# Altium PCB in_board.PcbDoc
Units mm, origin at the board's own origin, x right, y up, seen from the top; angles counter-clockwise.
Board outline 194.4 x 171.4 mm, 2 copper layers (Top Layer, Bottom Layer); 127 components, 196 nets, 535 pads, 0 vias.
Unrouted connection lines stored in the file: 320.
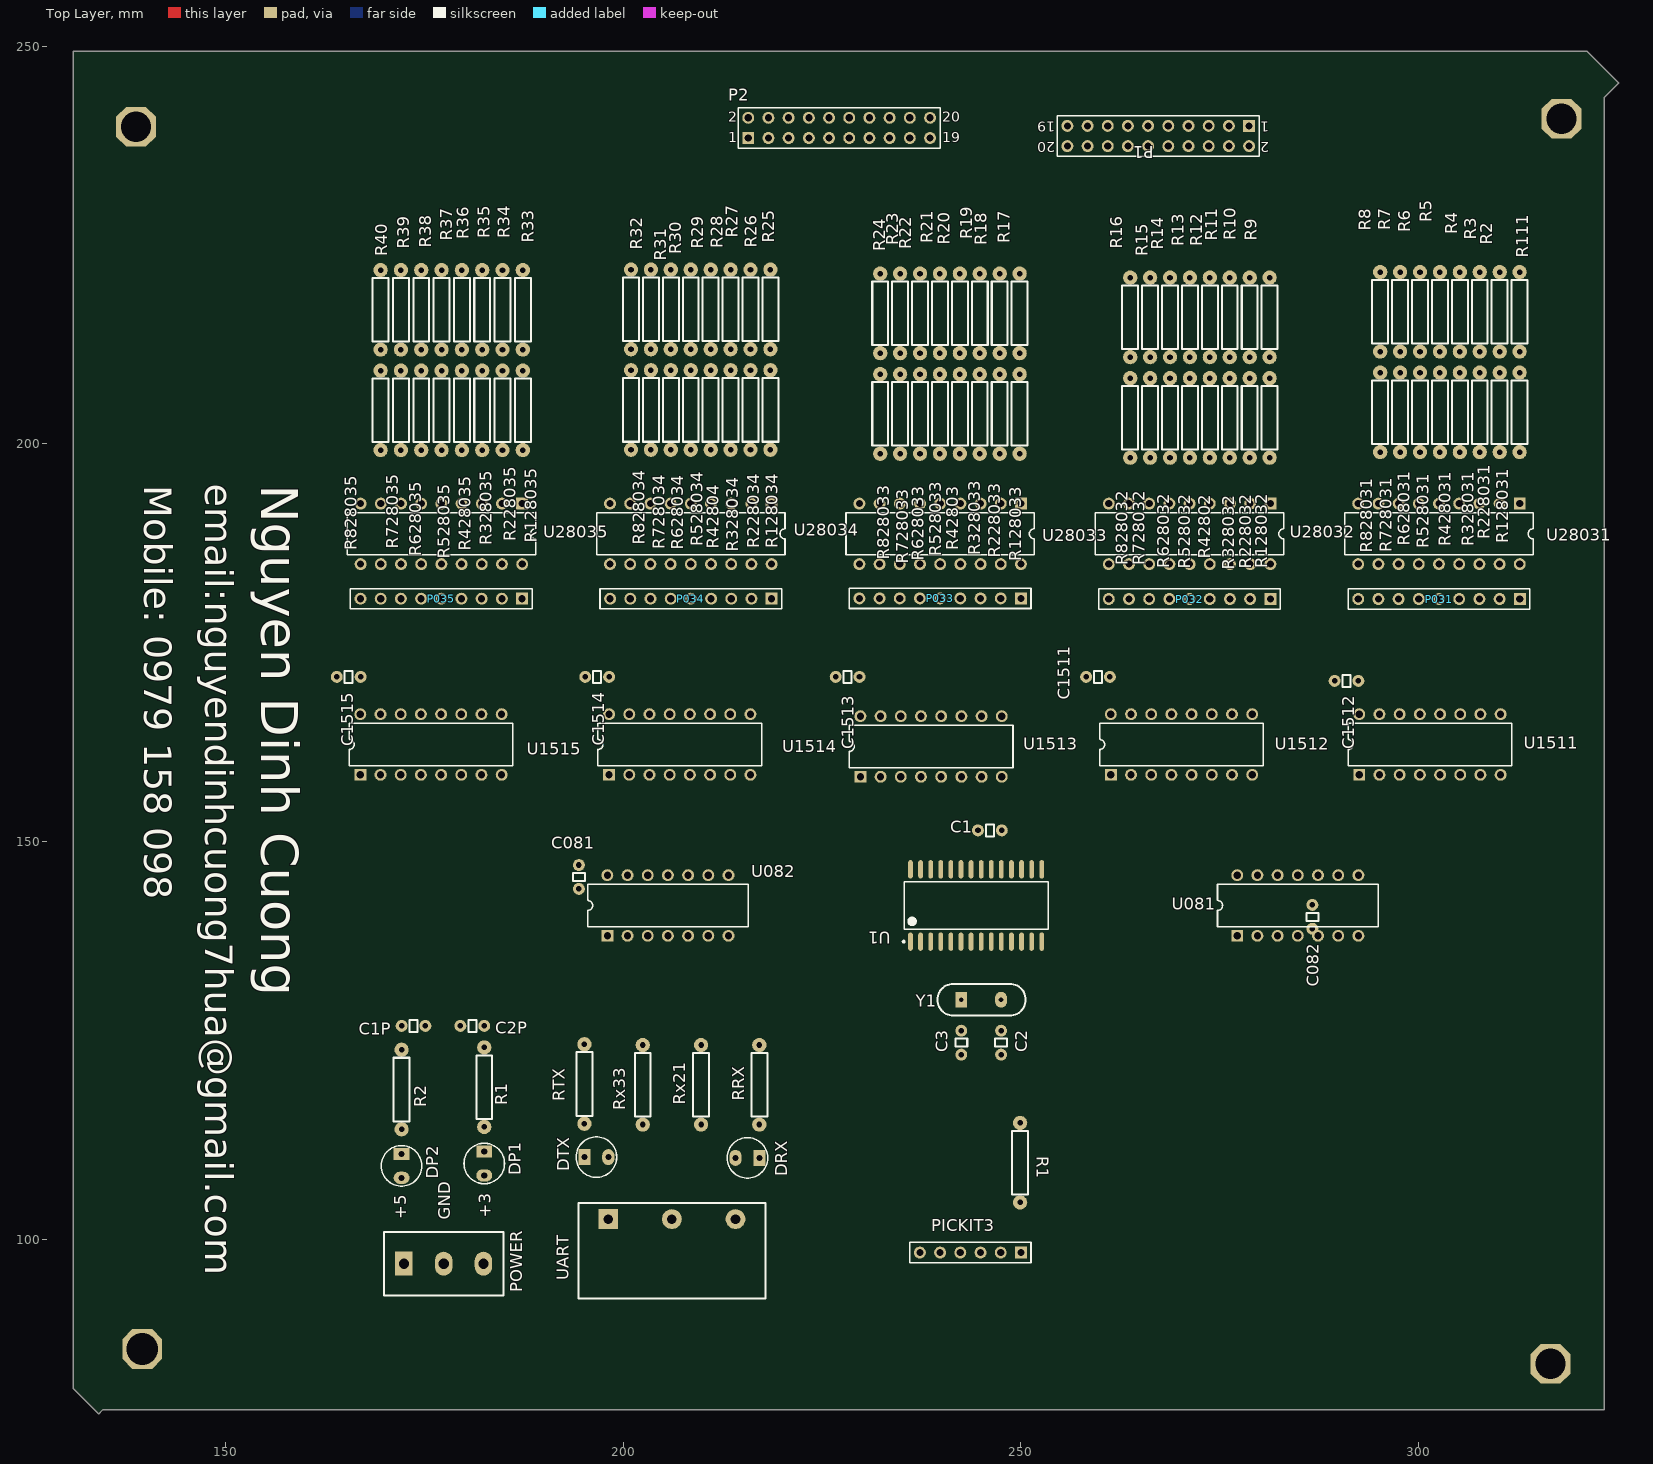
[diagram p0: Top Layer view]
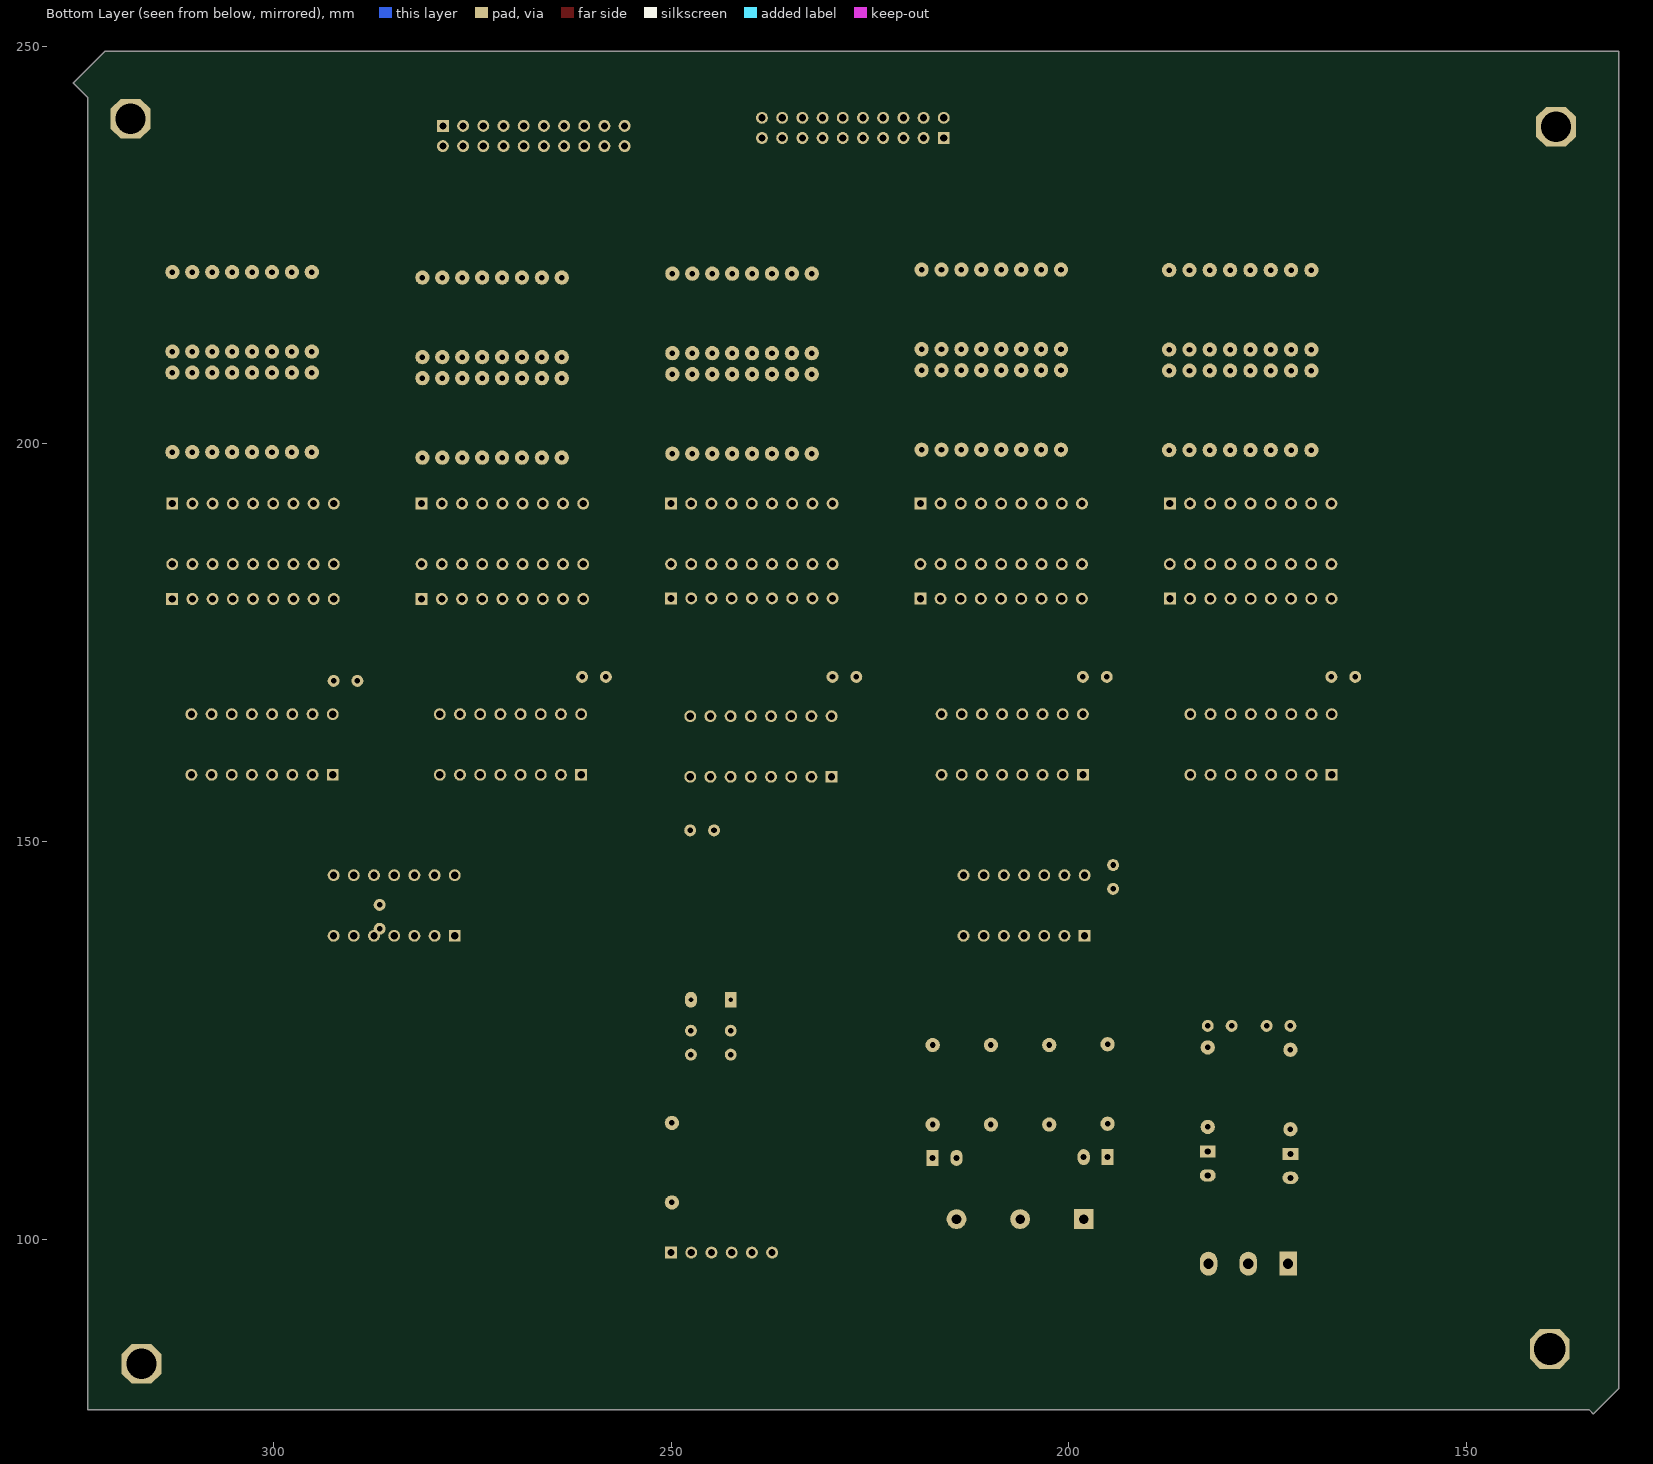
[diagram p1: Bottom Layer view, seen from below]

## Layer stack, top to bottom
Top Layer: signal copper 0.0356
Dielectric: dielectric 0.32, FR-4, Dk 4.8
Bottom Layer: signal copper 0.0356

## Board outline
133.5,78.5 130.8,81.2 130.8,249.4 321.2,249.4 325.2,245.4 323.4,243.6 323.4,78.5 134.5,78.5 134,78

## Design rules (kind name [scope] priority, off if disabled: settings)
Clearance [All] p1: gap=0.8
FabricationTestPointUsage TestPointUsage [All] p1: valid=0 allowmultiple=FALSE
FabricationTestpoint Testpoint [All] p1: side=3 testpointundercomponent=TRUE minsize=1.016 maxsize=2.54 preferedsize=1.524 minholesize=0 maxholesize=1.016 preferedholesize=0.813 testpointgrid=0.025 allowsidetop=TRUE allowsidebottom=TRUE usegrid=TRUE gridtolerance=0
PlaneClearance [All] p1: clearance=0.8
PlaneConnect [All] p1: planeconnectstyle=Relief reliefexpansion=1 reliefentries=4 reliefconductorwidth=1 reliefairgap=0.8
PolygonConnect [All] p1: connectstyle=Relief reliefconductorwidth=0.8 reliefentries=4 polygonreliefangle="90 Angle"
RoutingVias [All] p1: holewidth=0.711 width=1.27 viastyle="Through Hole" minholewidth=0.711 minwidth=1.27 maxholewidth=0.711 maxwidth=1.27
SilkscreenOverComponentPads [All] p1: minsilkscreentomaskgap=0.254
SolderMaskExpansion [All] p1: expansion=0.102
Width [All] p1: maxlimit=0.4 minlimit=0.4 preferedwidth=0.4
23 further rules are at their usual default settings.

## Components (designator, comment, footprint, x,y, rotation, side; value= is the part's Value field where it differs from the comment)
C1 "Cap" tu_gom 246.6,151.4 r0 top
C1P "Cap" tu_gom 174.1,126.8 r0 top
C2 "Cap2" tu_gom 247.5,124.2 r270 top
C2P "Cap" tu_gom 180.5,126.8 r180 top
C3 "Cap2" tu_gom 242.5,124.2 r270 top
C081 "Cap" tu_gom 194.412,145.04 r270 top
C082 "Cap" tu_gom 286.66,140.024 r270 top
C1511 "Cap" tu_gom 259.2,170.7 r180 top
C1512 "Cap" tu_gom 290.45,170.2 r180 top
C1513 "Cap" tu_gom 227.7,170.7 r180 top
C1514 "Cap" tu_gom 196.2,170.7 r180 top
C1515 "Cap" tu_gom 164.95,170.7 r180 top
DP1 "LED0" LED_3 182.5,110 r270 top
DP2 "LED0" LED_3 172.1,109.7 r270 top
DRX "LED0" LED_3 216.1,110.2 r180 top
DTX "LED0" LED_3 196.1,110.3 r0 top
P1 "Header 10X2" HDR2X10 278.7,240.008 r180 top
P2 "Header 10X2" HDR2X10 215.708,238.484 r0 top
P031 "Header 9" HDR1X9 312.75,180.5 r180 top
P032 "Header 9" HDR1X9 281.375,180.5 r180 top
P033 "Header 9" HDR1X9 250,180.575 r180 top
P034 "Header 9" HDR1X9 218.65,180.537 r180 top
P035 "Header 9" HDR1X9 187.253,180.537 r180 top
PICKIT3 "PICKIT3" HDR1X6 250,98.3 r180 top
POWER "Header 3" HEADER3 177.4,96.9 r0 top
R1 "Res3" R_Nor 182.5,119.1 r270 top (schematic designator RP1)
R1 "Res3" R_Nor 249.9,109.6 r90 top
R2 "Res" R_Nor 310.22,216.626 r270 top
R2 "Res3" R_Nor 172.1,118.8 r270 top (schematic designator Rp2)
R3 "Res" R_Nor 307.715,216.626 r270 top
R4 "Res" R_Nor 305.21,216.626 r270 top
R5 "Res" R_Nor 302.704,216.626 r270 top
R6 "Res" R_Nor 300.199,216.626 r270 top
R7 "Res" R_Nor 297.693,216.626 r270 top
R8 "Res" R_Nor 295.188,216.626 r270 top
R9 "Res" R_Nor 281.282,215.926 r270 top
R10 "Res" R_Nor 278.777,215.926 r270 top
R11 "Res" R_Nor 276.272,215.926 r270 top
R12 "Res" R_Nor 273.766,215.926 r270 top
R13 "Res" R_Nor 271.261,215.926 r270 top
R14 "Res" R_Nor 268.755,215.926 r270 top
R15 "Res" R_Nor 266.25,215.926 r270 top
R16 "Res" R_Nor 263.744,215.926 r270 top
R17 "Res" R_Nor 249.839,216.426 r270 top
R18 "Res" R_Nor 247.334,216.426 r270 top
R19 "Res" R_Nor 244.828,216.426 r270 top
R20 "Res" R_Nor 242.323,216.426 r270 top
R21 "Res" R_Nor 239.817,216.426 r270 top
R22 "Res" R_Nor 237.312,216.426 r270 top
R23 "Res" R_Nor 234.806,216.426 r270 top
R24 "Res" R_Nor 232.301,216.426 r270 top
R25 "Res" R_Nor 218.495,216.926 r270 top
R26 "Res" R_Nor 215.99,216.926 r270 top
R27 "Res" R_Nor 213.485,216.926 r270 top
R28 "Res" R_Nor 210.979,216.926 r270 top
R29 "Res" R_Nor 208.474,216.926 r270 top
R30 "Res" R_Nor 205.968,216.926 r270 top
R31 "Res" R_Nor 203.463,216.926 r270 top
R32 "Res" R_Nor 200.957,216.926 r270 top
R33 "Res" R_Nor 187.352,216.876 r270 top
R34 "Res" R_Nor 184.797,216.876 r270 top
R35 "Res" R_Nor 182.241,216.876 r270 top
R36 "Res" R_Nor 179.686,216.876 r270 top
R37 "Res" R_Nor 177.13,216.876 r270 top
R38 "Res" R_Nor 174.575,216.876 r270 top
R39 "Res" R_Nor 172.019,216.876 r270 top
R40 "Res" R_Nor 169.464,216.876 r270 top
R111 "Res" R_Nor 312.726,216.626 r270 top
R42802 "Res3" R_Nor 273.766,203.28 r90 top
R42803 "Res3" R_Nor 242.323,203.78 r90 top
R42804 "Res3" R_Nor 210.979,204.28 r90 top
R128031 "Res3" R_Nor 312.726,203.98 r90 top
R128032 "Res3" R_Nor 281.282,203.28 r90 top
R128033 "Res3" R_Nor 249.839,203.78 r90 top
R128034 "Res3" R_Nor 218.495,204.28 r90 top
R128035 "Res3" R_Nor 187.352,204.23 r90 top
R228031 "Res3" R_Nor 310.22,203.98 r90 top
R228032 "Res3" R_Nor 278.777,203.28 r90 top
R228033 "Res3" R_Nor 247.334,203.78 r90 top
R228034 "Res3" R_Nor 215.99,204.28 r90 top
R228035 "Res3" R_Nor 184.797,204.23 r90 top
R328031 "Res3" R_Nor 307.715,203.98 r90 top
R328032 "Res3" R_Nor 276.272,203.28 r90 top
R328033 "Res3" R_Nor 244.828,203.78 r90 top
R328034 "Res3" R_Nor 213.485,204.28 r90 top
R328035 "Res3" R_Nor 182.241,204.23 r90 top
R428031 "Res3" R_Nor 305.21,203.98 r90 top
R428035 "Res3" R_Nor 179.686,204.23 r90 top
R528031 "Res3" R_Nor 302.704,203.98 r90 top
R528032 "Res3" R_Nor 271.261,203.28 r90 top
R528033 "Res3" R_Nor 239.817,203.78 r90 top
R528034 "Res3" R_Nor 208.474,204.28 r90 top
R528035 "Res3" R_Nor 177.13,204.23 r90 top
R628031 "Res3" R_Nor 300.199,203.98 r90 top
R628032 "Res3" R_Nor 268.755,203.28 r90 top
R628033 "Res3" R_Nor 237.312,203.78 r90 top
R628034 "Res3" R_Nor 205.968,204.28 r90 top
R628035 "Res3" R_Nor 174.575,204.23 r90 top
R728031 "Res3" R_Nor 297.693,203.98 r90 top
R728032 "Res3" R_Nor 266.25,203.28 r90 top
R728033 "Res3" R_Nor 234.806,203.78 r90 top
R728034 "Res3" R_Nor 203.463,204.28 r90 top
R728035 "Res3" R_Nor 172.019,204.23 r90 top
R828031 "Res3" R_Nor 295.188,203.98 r90 top
R828032 "Res3" R_Nor 263.744,203.28 r90 top
R828033 "Res3" R_Nor 232.301,203.78 r90 top
R828034 "Res3" R_Nor 200.957,204.28 r90 top
R828035 "Res3" R_Nor 169.464,204.23 r90 top
RRX "Res3" R_Nor 217.1,119.4 r270 top
RTX "Res3" R_Nor 195.1,119.5 r270 top
Rx21 "330R" R_Nor 209.767,119.4 r90 top
Rx33 "220R" R_Nor 202.433,119.4 r90 top
U1 "PIC18F26K20" SOIC300-28_N 244.364,141.95 r90 top
U081 "74AC08B" DIP14 284.829,141.95 r0 top
U082 "74AC08B" DIP14 205.6,141.95 r0 top
U1511 "74F151APC" N16E 301.45,162.2 r0 top
U1512 "74F151APC" N16E 270.2,162.2 r0 top
U1513 "74F151APC" N16E 238.7,161.95 r0 top
U1514 "74F151APC" N16E 207.093,162.2 r0 top
U1515 "74F151APC" N16E 175.8,162.2 r0 top
U28031 "ULN2803A" DIP18 302.585,188.694 r180 top
U28032 "ULN2803A" DIP18 271.216,188.694 r180 top
U28033 "ULN2803A" DIP18 239.847,188.694 r180 top
U28034 "ULN2803A" DIP18 208.478,188.694 r180 top
U28035 "ULN2803A" DIP18 177.109,188.694 r180 top
UART "Header 3" Coc3_15A 206.1,102.5 r0 top
Y1 "8MHz" Xtal12M 245.5,128.1 r0 top

## Footprints (in the part's own frame and the unit in brackets; to place one, negate y for a bottom-side part, rotate by r counter-clockwise, add the part's x,y. Pads: shape width x height; smd on the part's side, far side on the other; paste and mask are expansions set on the pad)
Coc3_15A [mm]
  rect 2.5x2.5 hole 1.2: 1(-8,0)
  round 2.5 hole 1.2: 2(0,0) 3(8,0)
  silkscreen extent -11.75,-10 11.75,2
DIP14 [mm] "DIP; 14 Leads; Row Spacing 7.62 mm; Pitch 2.54 mm"
  rect 1.5x1.5 hole 0.9: 1(-7.62,-3.81)
  round 1.5 hole 0.9: 2(-5.08,-3.81) 3(-2.54,-3.81) 4(0,-3.81) 5(2.54,-3.81) 6(5.08,-3.81) 7(7.62,-3.81) 8(7.62,3.81) 9(5.08,3.81) 10(2.54,3.81) 11(0,3.81) 12(-2.54,3.81) 13(-5.08,3.81) 14(-7.62,3.81)
  silkscreen extent -10.1,-2.65 10.1,2.65
DIP18 [mm] "DIP; 18 Leads; Row Spacing 7.62 mm; Pitch 2.54 mm"
  rect 1.5x1.5 hole 0.9: 1(-10.16,-3.81)
  round 1.5 hole 0.9: 2(-7.62,-3.81) 3(-5.08,-3.81) 4(-2.54,-3.81) 5(0,-3.81) 6(2.54,-3.81) 7(5.08,-3.81) 8(7.62,-3.81) 9(10.16,-3.81) 10(10.16,3.81) 11(7.62,3.81) 12(5.08,3.81) 13(2.54,3.81) 14(0,3.81) 15(-2.54,3.81) 16(-5.08,3.81) 17(-7.62,3.81) 18(-10.16,3.81)
  silkscreen extent -11.85,-2.65 11.85,2.65
HDR1X6 [mm] "Connector; Header; 6 Position"
  rect 1.5x1.5 hole 0.9: 1(0,0)
  round 1.5 hole 0.9: 2(2.54,0) 3(5.08,0) 4(7.62,0) 5(10.16,0) 6(12.7,0)
  silkscreen extent -1.27,-1.27 13.97,1.27
HDR1X9 [mm] "Connector; Header; 9 Position"
  rect 1.5x1.5 hole 0.9: 1(0,0)
  round 1.5 hole 0.9: 2(2.54,0) 3(5.08,0) 4(7.62,0) 5(10.16,0) 6(12.7,0) 7(15.24,0) 8(17.78,0) 9(20.32,0)
  silkscreen extent -1.27,-1.27 21.59,1.27
HDR2X10 [mm] "Connector; Header; 10x2 Position"
  rect 1.5x1.5 hole 0.9: 1(0,0)
  round 1.5 hole 0.9: 2(0,2.54) 3(2.54,0) 4(2.54,2.54) 5(5.08,0) 6(5.08,2.54) 7(7.62,0) 8(7.62,2.54) 9(10.16,0) 10(10.16,2.54) 11(12.7,0) 12(12.7,2.54) 13(15.24,0) 14(15.24,2.54) 15(17.78,0) 16(17.78,2.54) 17(20.32,0) 18(20.32,2.54) 19(22.86,0) 20(22.86,2.54)
  silkscreen extent -1.27,-1.27 24.13,3.81
HEADER3 [mm]
  rect 2.2x3 hole 1.3: 1(-5,0)
  oval 2.2x3 hole 1.3: 2(0,0) 3(5,0)
  silkscreen extent -7.5,-4 7.5,4
LED_3 [mm]
  rect 1.524x2 hole 0.762: 1(-1,0)
  oval 1.524x2 hole 0.762: 2(2,0)
  silkscreen extent -2.05,-2.55 3.05,2.55
N16E [mm] "DIP; 16 Leads; Row Spacing 7.62 mm; Pitch 2.54 mm"
  rect 1.5x1.5 hole 0.9: 1(-8.89,-3.81)
  round 1.5 hole 0.9: 2(-6.35,-3.81) 3(-3.81,-3.81) 4(-1.27,-3.81) 5(1.27,-3.81) 6(3.81,-3.81) 7(6.35,-3.81) 8(8.89,-3.81) 9(8.89,3.81) 10(6.35,3.81) 11(3.81,3.81) 12(1.27,3.81) 13(-1.27,3.81) 14(-3.81,3.81) 15(-6.35,3.81) 16(-8.89,3.81)
  silkscreen extent -10.3,-2.65 10.3,2.65
R_Nor [mm]
  round 1.8 hole 0.7: 1(-5,0) 2(5,0)
  silkscreen extent -4,-1 4,1
SOIC300-28_N [mm] "SOIC, 28-Leads, Body 17.9x7.5mm, Pitch 1.27mm, IPC Medium Density"
  oval 2.3x0.6 smd: 1(-4.55,8.255) 2(-4.55,6.985) 3(-4.55,5.715) 4(-4.55,4.445) 5(-4.55,3.175) 6(-4.55,1.905) 7(-4.55,0.635) 8(-4.55,-0.635) 9(-4.55,-1.905) 10(-4.55,-3.175) 11(-4.55,-4.445) 12(-4.55,-5.715) 13(-4.55,-6.985) 14(-4.55,-8.255) 15(4.55,-8.255) 16(4.55,-6.985) 17(4.55,-5.715) 18(4.55,-4.445) 19(4.55,-3.175) 20(4.55,-1.905) 21(4.55,-0.635) 22(4.55,0.635) 23(4.55,1.905) 24(4.55,3.175) 25(4.55,4.445) 26(4.55,5.715) 27(4.55,6.985) 28(4.55,8.255)
  silkscreen extent -4.67,-9.05 3,9.23, body extent -3.8,-9.06 3.8,9.06, height 2.65
tu_gom [mm]
  round 1.5 hole 0.7: 1(-2,0) 2(1,0)
  silkscreen extent -1,-0.75 0,0.75
Xtal12M [mm]
  rect 1.5x2 hole 0.6: 1(-3,2)
  oval 1.5x2 hole 0.6: 2(2,2)
  silkscreen extent -6,0 5.1,4

## Part data
C1 C1P C2 C2P C3 C081 C082 C1511 C1512 C1513 C1514 C1515: "Capacitor"
DP1 DP2 DRX DTX: "Typical INFRARED GaAs LED"
P1 P2: "Header, 10-Pin, Dual row"
P031 P032 P033 P034 P035: "Header, 9-Pin"
PICKIT3: library part "Header 6", "Header, 6-Pin"
POWER UART: "Header, 3-Pin"
R1 R1 R2 R42802 R42803 R42804 R128031 R128032 R128033 R128034 R128035 R228031 R228032 R228033 R228034 R228035 R328031 R328032 R328033 R328034 R328035 R428031 R428035 R528031 R528032 R528033 R528034 R528035 R628031 R628032 R628033 R628034 R628035 R728031 R728032 R728033 R728034 R728035 R828031 R828032 R828033 R828034 R828035 RRX RTX: "Resistor"
Rx21 Rx33: library part Res
U1: library part PIC18F242-E/SO, "High Performance, Enhanced FLASH Microcontroller with 10-Bit A/D, 16K FLASH, 28-Pin SOIC, Standard Volt Range, Extended Temperature"
U081 U082: "Quad 2-Input AND Gate"
U1511 U1512 U1513 U1514 U1515: "8-Input Multiplexer"
U28031 U28032 U28033 U28034 U28035: "Eight Darlington Array"
Y1: library part XTAL, "Crystal Oscillator"

## Free pads (board coordinates)
  oct 5x5 hole 4: 2(139.475,86.15)
  oct 5x5 hole 3.8: 3(316.6,84.3) 4(318,240.9) 60(138.7,239.9)

## Nets (pads, with @x,y where several pads share a name; then routed paths per layer and width w, separated by ;. In a path a pad name is that pad's centre, name@x,y a point inside that pad or via, vN(x,y) a via of type N, cw(c..) or ccw(c..) an arc to the next point about the centre after c; other vN are vias at no path point)
+3V: C1.1 C2P.1 PICKIT3.2 POWER.3 R1.2 RRX.1 RTX.1 U1.20
A: U081.11 U1511.11 U1512.11 U1513.11 U1514.11 U1515.11
AP: U1.21 U081.12 U081.13
B: U081.8 U1511.10 U1512.10 U1513.10 U1514.10 U1515.10
BP: U1.22 U081.9 U081.10
C: U081.6 U1511.9 U1512.9 U1513.9 U1514.9 U1515.9
CP: U1.23 U081.4 U081.5
GND: C1.2 C1P.2 C2.2 C2P.2 C3.2 C081.2 C082.2 C1511.2 C1512.2 C1513.2 C1514.2 C1515.2 DP1.2 DP2.2 PICKIT3.3 POWER.2 Rx33.1 U1.8 U1.19 U081.7 U082.7 U1511.8 U1512.8 U1513.8 U1514.8 U1515.8 U28031.9 U28032.9 U28033.9 U28034.9 U28035.9 UART.2
IN1: P1.19 R111.1
IN2: P1.17 R2.1@310.22,221.626
IN3: P1.15 R3.1
IN4: P1.13 R4.1
IN5: P1.11 R5.1
IN6: P1.9 R6.1
IN7: P1.7 R7.1
IN8: P1.5 R8.1
IN9: P1.3 R9.1
IN10: P1.1 R10.1
IN11: P1.2 R11.1
IN12: P1.4 R12.1
IN13: P1.6 R13.1
IN14: P1.8 R14.1
IN15: P1.10 R15.1
IN16: P1.12 R16.1
IN17: P1.14 R17.1
IN18: P1.16 R18.1
IN19: P1.18 R19.1
IN20: P1.20 R20.1
IN21: P2.2 R21.1
IN22: P2.4 R22.1
IN23: P2.6 R23.1
IN24: P2.8 R24.1
IN25: P2.10 R25.1
IN26: P2.12 R26.1
IN27: P2.14 R27.1
IN28: P2.16 R28.1
IN29: P2.18 R29.1
IN30: P2.20 R30.1
IN31: P2.19 R31.1
IN32: P2.17 R32.1
IN33: P2.15 R33.1
IN34: P2.13 R34.1
IN35: P2.11 R35.1
IN36: P2.9 R36.1
IN37: P2.7 R37.1
IN38: P2.5 R38.1
IN39: P2.3 R39.1
IN40: P2.1 R40.1
LVP: PICKIT3.6
MCLR: PICKIT3.1 R1.1 U1.1
NetC2_1: C2.1 U1.10 Y1.2
NetC3_1: C3.1 U1.9 Y1.1
NetDP1_1: DP1.1
NetDP2_1: DP2.1 R2.2@172.1,113.8
NetDRX_1: DRX.1 RRX.2
NetDTX_1: DTX.1 RTX.2
NetP031_1: P031.1 U1511.4 U28031.18
NetP031_2: P031.2 U1511.3 U28031.17
NetP031_3: P031.3 U1511.2 U28031.16
NetP031_4: P031.4 U1511.1 U28031.15
NetP031_5: P031.5 U1511.15 U28031.14
NetP031_6: P031.6 U1511.14 U28031.13
NetP031_7: P031.7 U1511.13 U28031.12
NetP031_8: P031.8 U1511.12 U28031.11
NetP032_1: P032.1 U1512.4 U28032.18
NetP032_2: P032.2 U1512.3 U28032.17
NetP032_3: P032.3 U1512.2 U28032.16
NetP032_4: P032.4 U1512.1 U28032.15
NetP032_5: P032.5 U1512.15 U28032.14
NetP032_6: P032.6 U1512.14 U28032.13
NetP032_7: P032.7 U1512.13 U28032.12
NetP032_8: P032.8 U1512.12 U28032.11
NetP033_1: P033.1 U1513.4 U28033.18
NetP033_2: P033.2 U1513.3 U28033.17
NetP033_3: P033.3 U1513.2 U28033.16
NetP033_4: P033.4 U1513.1 U28033.15
NetP033_5: P033.5 U1513.15 U28033.14
NetP033_6: P033.6 U1513.14 U28033.13
NetP033_7: P033.7 U1513.13 U28033.12
NetP033_8: P033.8 U1513.12 U28033.11
NetP034_1: P034.1 U1514.4 U28034.18
NetP034_2: P034.2 U1514.3 U28034.17
NetP034_3: P034.3 U1514.2 U28034.16
NetP034_4: P034.4 U1514.1 U28034.15
NetP034_5: P034.5 U1514.15 U28034.14
NetP034_6: P034.6 U1514.14 U28034.13
NetP034_7: P034.7 U1514.13 U28034.12
NetP034_8: P034.8 U1514.12 U28034.11
NetP035_1: P035.1 U1515.4 U28035.18
NetP035_2: P035.2 U1515.3 U28035.17
NetP035_3: P035.3 U1515.2 U28035.16
NetP035_4: P035.4 U1515.1 U28035.15
NetP035_5: P035.5 U1515.15 U28035.14
NetP035_6: P035.6 U1515.14 U28035.13
NetP035_7: P035.7 U1515.13 U28035.12
NetP035_8: P035.8 U1515.12 U28035.11
NetR2_2: R2.2@310.22,211.626 R228031.2
NetR3_2: R3.2 R328031.2
NetR4_2: R4.2 R428031.2
NetR5_2: R5.2 R528031.2
NetR6_2: R6.2 R628031.2
NetR7_2: R7.2 R728031.2
NetR8_2: R8.2 R828031.2
NetR9_2: R9.2 R128032.2
NetR10_2: R10.2 R228032.2
NetR11_2: R11.2 R328032.2
NetR12_2: R12.2 R42802.2
NetR13_2: R13.2 R528032.2
NetR14_2: R14.2 R628032.2
NetR15_2: R15.2 R728032.2
NetR16_2: R16.2 R828032.2
NetR17_2: R17.2 R128033.2
NetR18_2: R18.2 R228033.2
NetR19_2: R19.2 R328033.2
NetR20_2: R20.2 R42803.2
NetR21_2: R21.2 R528033.2
NetR22_2: R22.2 R628033.2
NetR23_2: R23.2 R728033.2
NetR24_2: R24.2 R828033.2
NetR25_2: R25.2 R128034.2
NetR26_2: R26.2 R228034.2
NetR27_2: R27.2 R328034.2
NetR28_2: R28.2 R42804.2
NetR29_2: R29.2 R528034.2
NetR30_2: R30.2 R628034.2
NetR31_2: R31.2 R728034.2
NetR32_2: R32.2 R828034.2
NetR33_2: R33.2 R128035.2
NetR34_2: R34.2 R228035.2
NetR35_2: R35.2 R328035.2
NetR36_2: R36.2 R428035.2
NetR37_2: R37.2 R528035.2
NetR38_2: R38.2 R628035.2
NetR39_2: R39.2 R728035.2
NetR40_2: R40.2 R828035.2
NetR111_2: R111.2 R128031.2
NetR42802_1: R42802.1 U28032.4
NetR42803_1: R42803.1 U28033.4
NetR42804_1: R42804.1 U28034.4
NetR128031_1: R128031.1 U28031.1
NetR128032_1: R128032.1 U28032.1
NetR128033_1: R128033.1 U28033.1
NetR128034_1: R128034.1 U28034.1
NetR128035_1: R128035.1 U28035.1
NetR228031_1: R228031.1 U28031.2
NetR228032_1: R228032.1 U28032.2
NetR228033_1: R228033.1 U28033.2
NetR228034_1: R228034.1 U28034.2
NetR228035_1: R228035.1 U28035.2
NetR328031_1: R328031.1 U28031.3
NetR328032_1: R328032.1 U28032.3
NetR328033_1: R328033.1 U28033.3
NetR328034_1: R328034.1 U28034.3
NetR328035_1: R328035.1 U28035.3
NetR428031_1: R428031.1 U28031.4
NetR428035_1: R428035.1 U28035.4
NetR528031_1: R528031.1 U28031.5
NetR528032_1: R528032.1 U28032.5
NetR528033_1: R528033.1 U28033.5
NetR528034_1: R528034.1 U28034.5
NetR528035_1: R528035.1 U28035.5
NetR628031_1: R628031.1 U28031.6
NetR628032_1: R628032.1 U28032.6
NetR628033_1: R628033.1 U28033.6
NetR628034_1: R628034.1 U28034.6
NetR628035_1: R628035.1 U28035.6
NetR728031_1: R728031.1 U28031.7
NetR728032_1: R728032.1 U28032.7
NetR728033_1: R728033.1 U28033.7
NetR728034_1: R728034.1 U28034.7
NetR728035_1: R728035.1 U28035.7
NetR828031_1: R828031.1 U28031.8
NetR828032_1: R828032.1 U28032.8
NetR828033_1: R828033.1 U28033.8
NetR828034_1: R828034.1 U28034.8
NetR828035_1: R828035.1 U28035.8
PGC: PICKIT3.5 U1.27
PGD: PICKIT3.4 U1.28
RX: DRX.2 Rx21.1 Rx33.2 U1.18 UART.3
STB1: U081.3 U1511.7
STB1P: U1.24 U081.1 U081.2
STB2: U082.11 U1512.7
STB2P: U1.25 U082.12 U082.13
STB3: U082.8 U1513.7
STB3P: U1.26 U082.9 U082.10
STB4: U082.6 U1514.7
STB4P: U1.2 U082.4 U082.5
STB5: U082.3 U1515.7
STB5P: U1.3 U082.1 U082.2
TH1: U1.11
TH2: U1.12
TH3: U1.13
TH4: U1.14
TH5: U1.15
TX: DTX.2 U1.17 UART.1
VCC: C1P.1 C081.1 C082.1 C1511.1 C1512.1 C1513.1 C1514.1 C1515.1 P031.9 P032.9 P033.9 P034.9 P035.9 POWER.1 R2.1@172.1,123.8 Rx21.2 U081.14 U082.14 U1511.16 U1512.16 U1513.16 U1514.16 U1515.16 U28031.10 U28032.10 U28033.10 U28034.10 U28035.10
pads on no net: U1.4 U1.5 U1.6 U1.7 U1.16 U1511.5 U1511.6 U1512.5 U1512.6 U1513.5 U1513.6 U1514.5 U1514.6 U1515.5 U1515.6

## Silkscreen, mask and mechanical layers (free items; w line width, h text height)
Top Overlay:
  text "email:nguyendinhcuong7hua@gmail.com" at 146.2,195 h6 r270
  text "Nguyen Dinh Cuong" at 152.875,194.9 h8 r270
  text "Mobile: 0979 158 098" at 138.525,194.8 h6 r270
  text "+3" at 183.3,102.7 h1.52 r90
  text "+5" at 172.7,102.5 h1.52 r90
  text "GND" at 178.2,102.4 h1.52 r90

## Text inside footprints (layer, text, board x,y; h text height)
P1: Top Overlay "20" at 254.316,237.976 h1.27 r180; Top Overlay "19" at 254.316,240.516 h1.27 r180; Top Overlay "1" at 281.24,240.516 h1.27 r180; Top Overlay "2" at 281.24,237.976 h1.27 r180
P2: Top Overlay "20" at 240.092,240.516 h1.27; Top Overlay "19" at 240.092,237.976 h1.27; Top Overlay "1" at 213.168,237.976 h1.27; Top Overlay "2" at 213.168,240.516 h1.27